# Altium PCB USBtoUARTboard.PcbDoc
Units mil, origin at the board's own origin, x right, y up, seen from the top; angles counter-clockwise.
Board outline 1035 x 1010 mil, 2 copper layers (Top Layer, Bottom Layer); 23 components, 21 nets, 82 pads, 83 vias.
Unrouted connection lines stored in the file: 1.
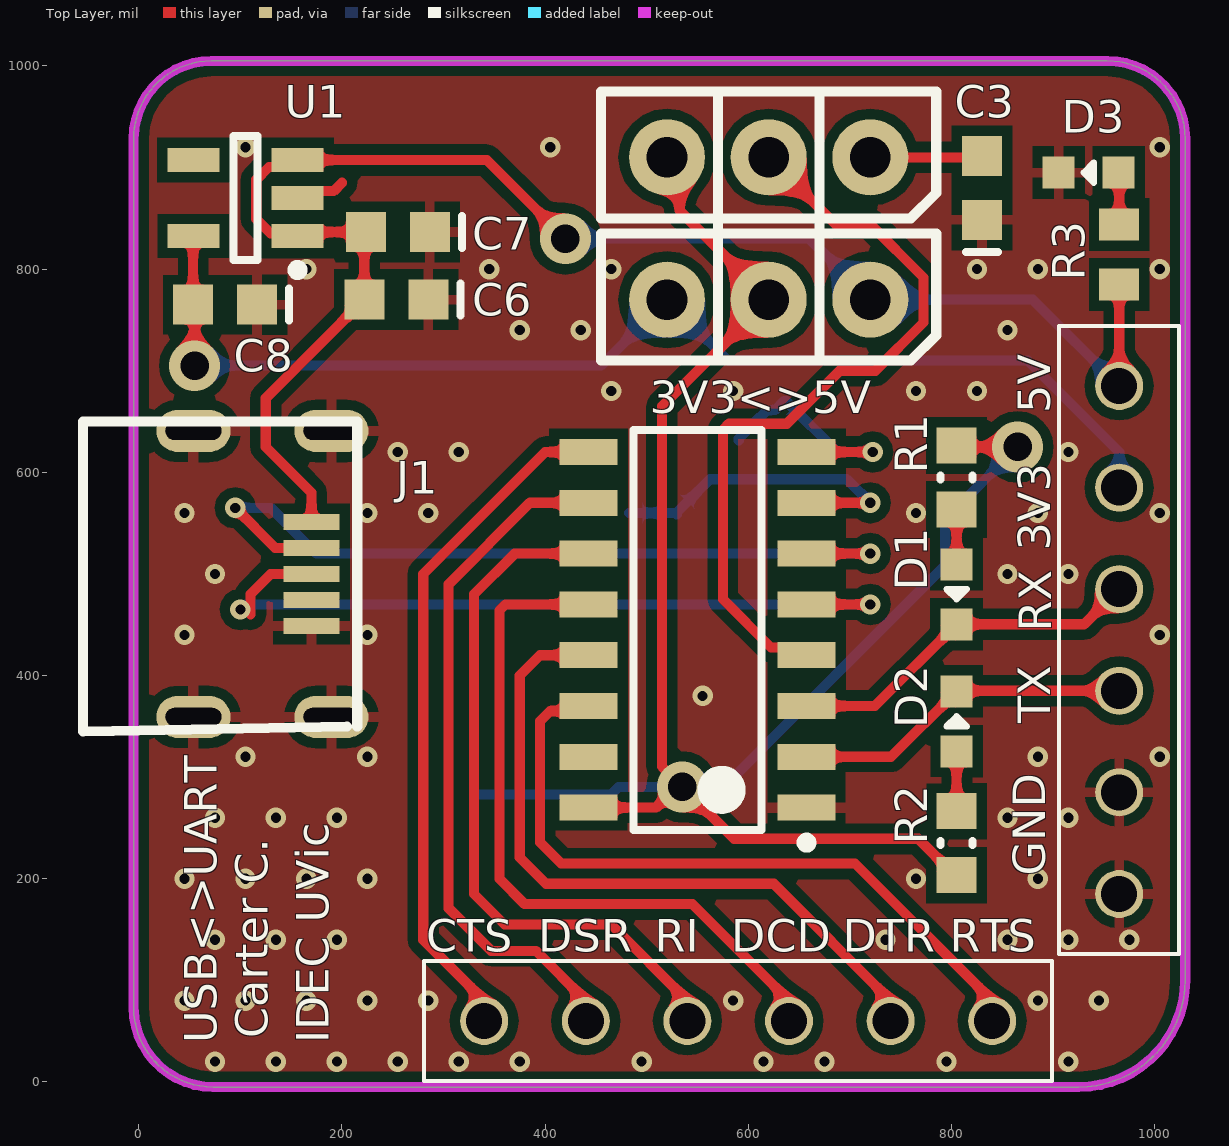
[diagram p0: Top Layer view]
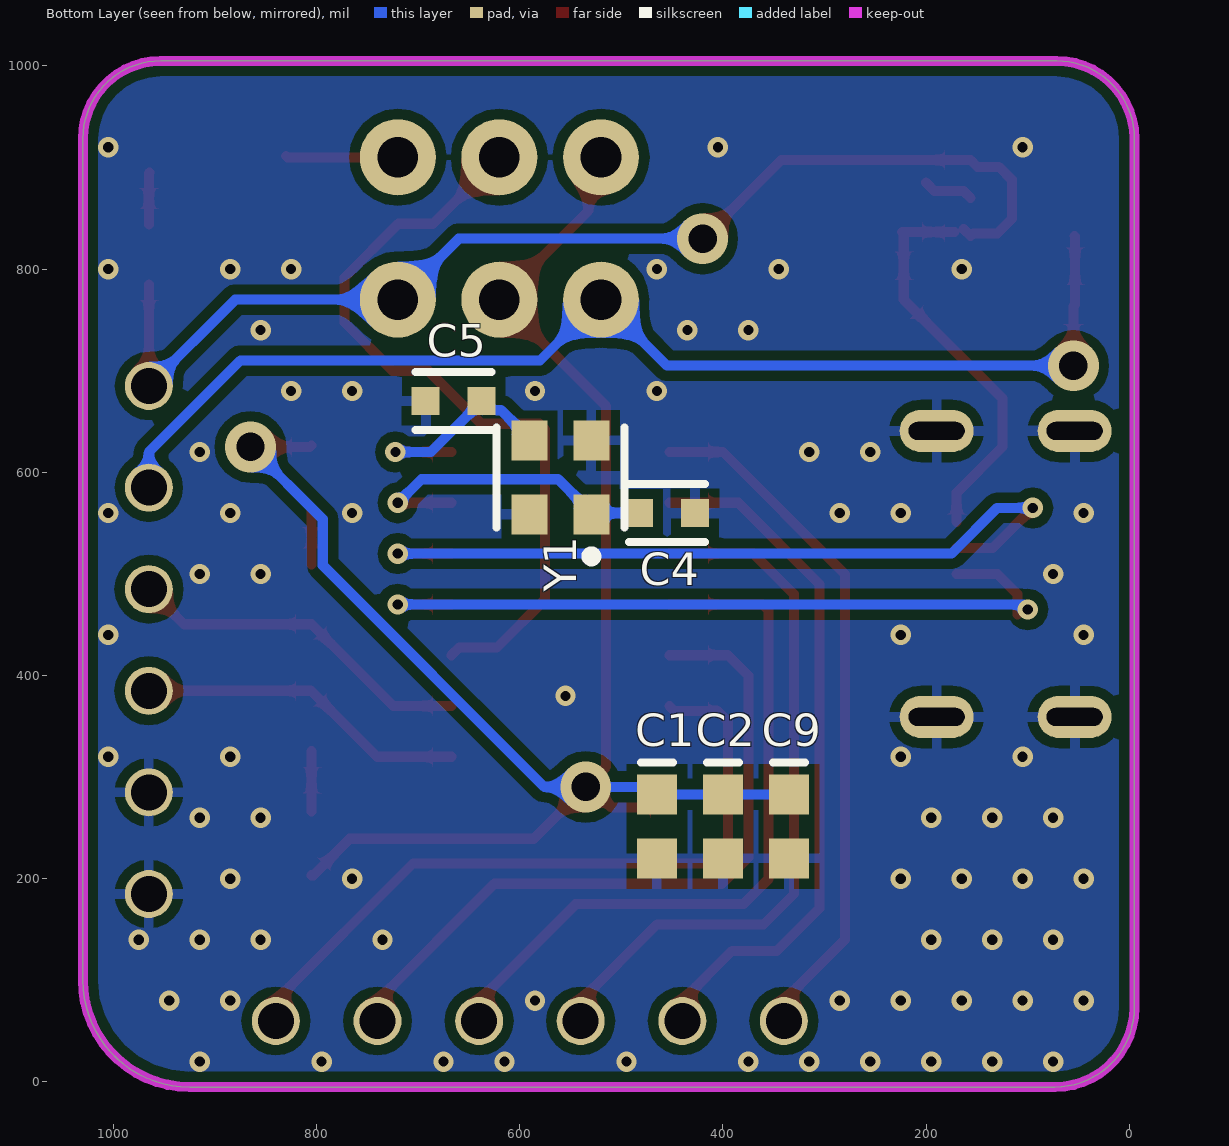
[diagram p1: Bottom Layer view, seen from below]
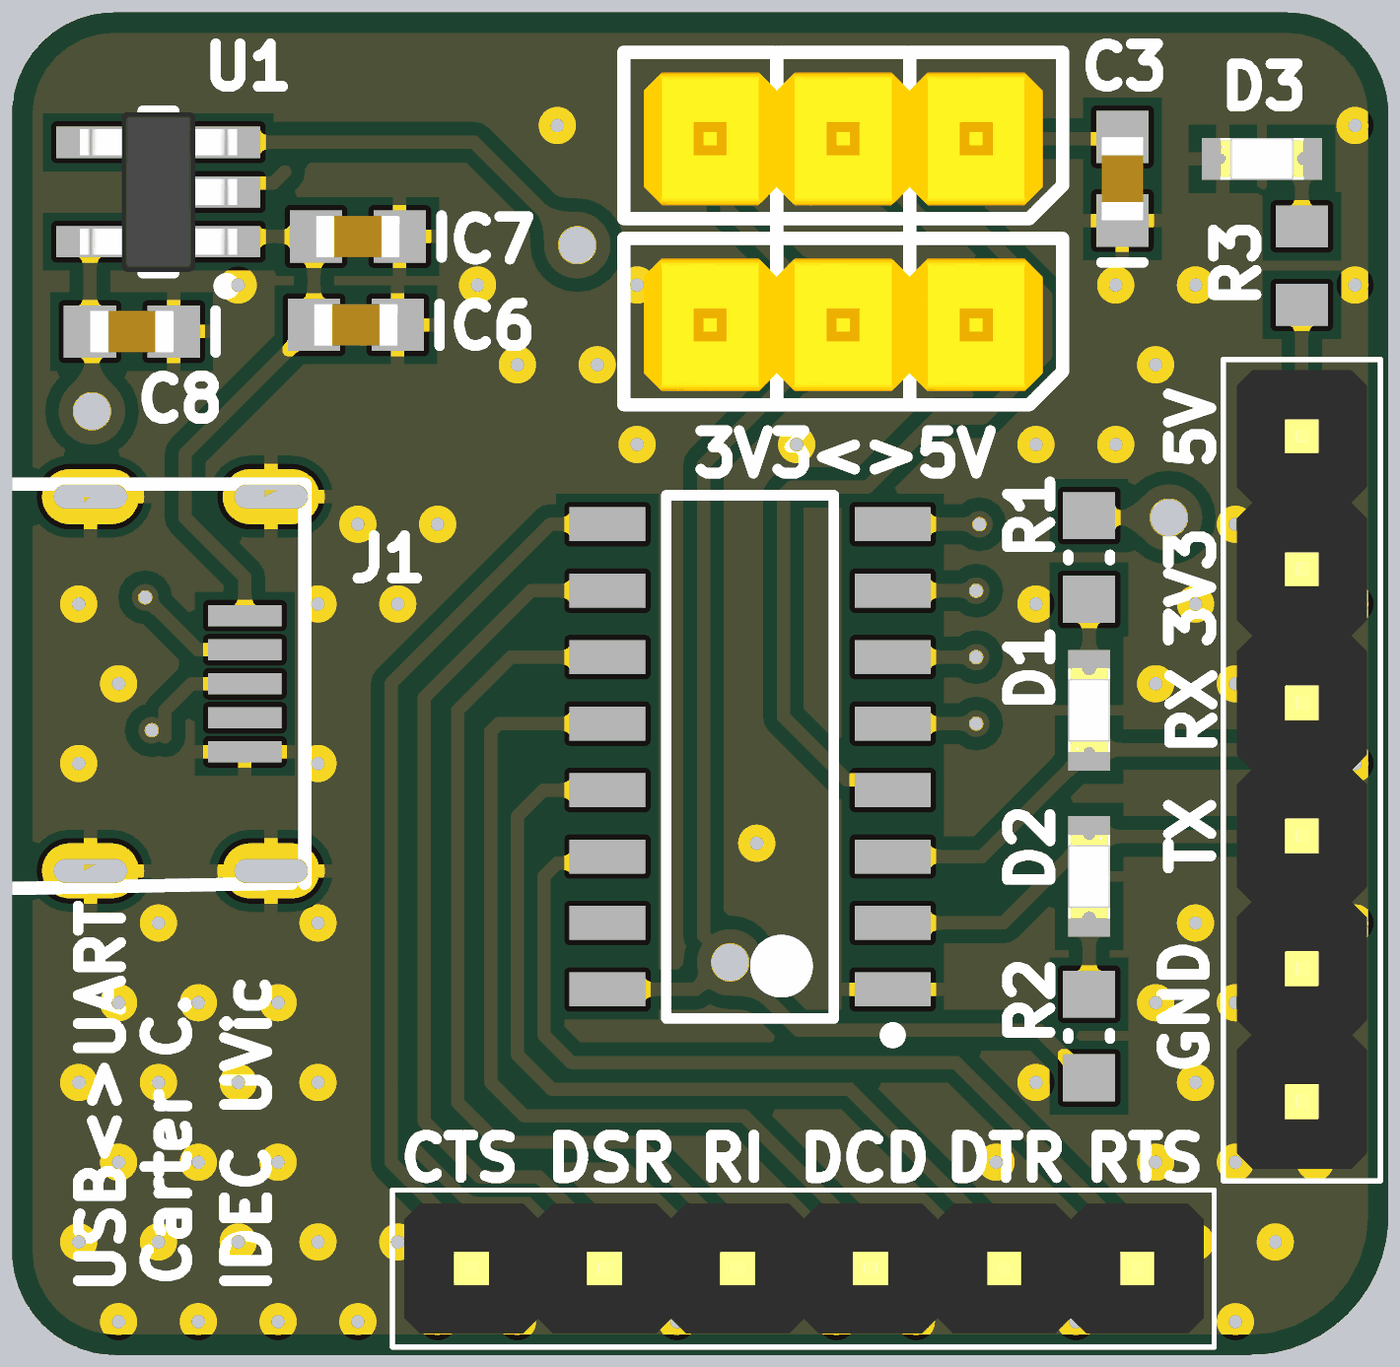
[diagram p2: 3D render of the assembled board from above, using the file's embedded part models]
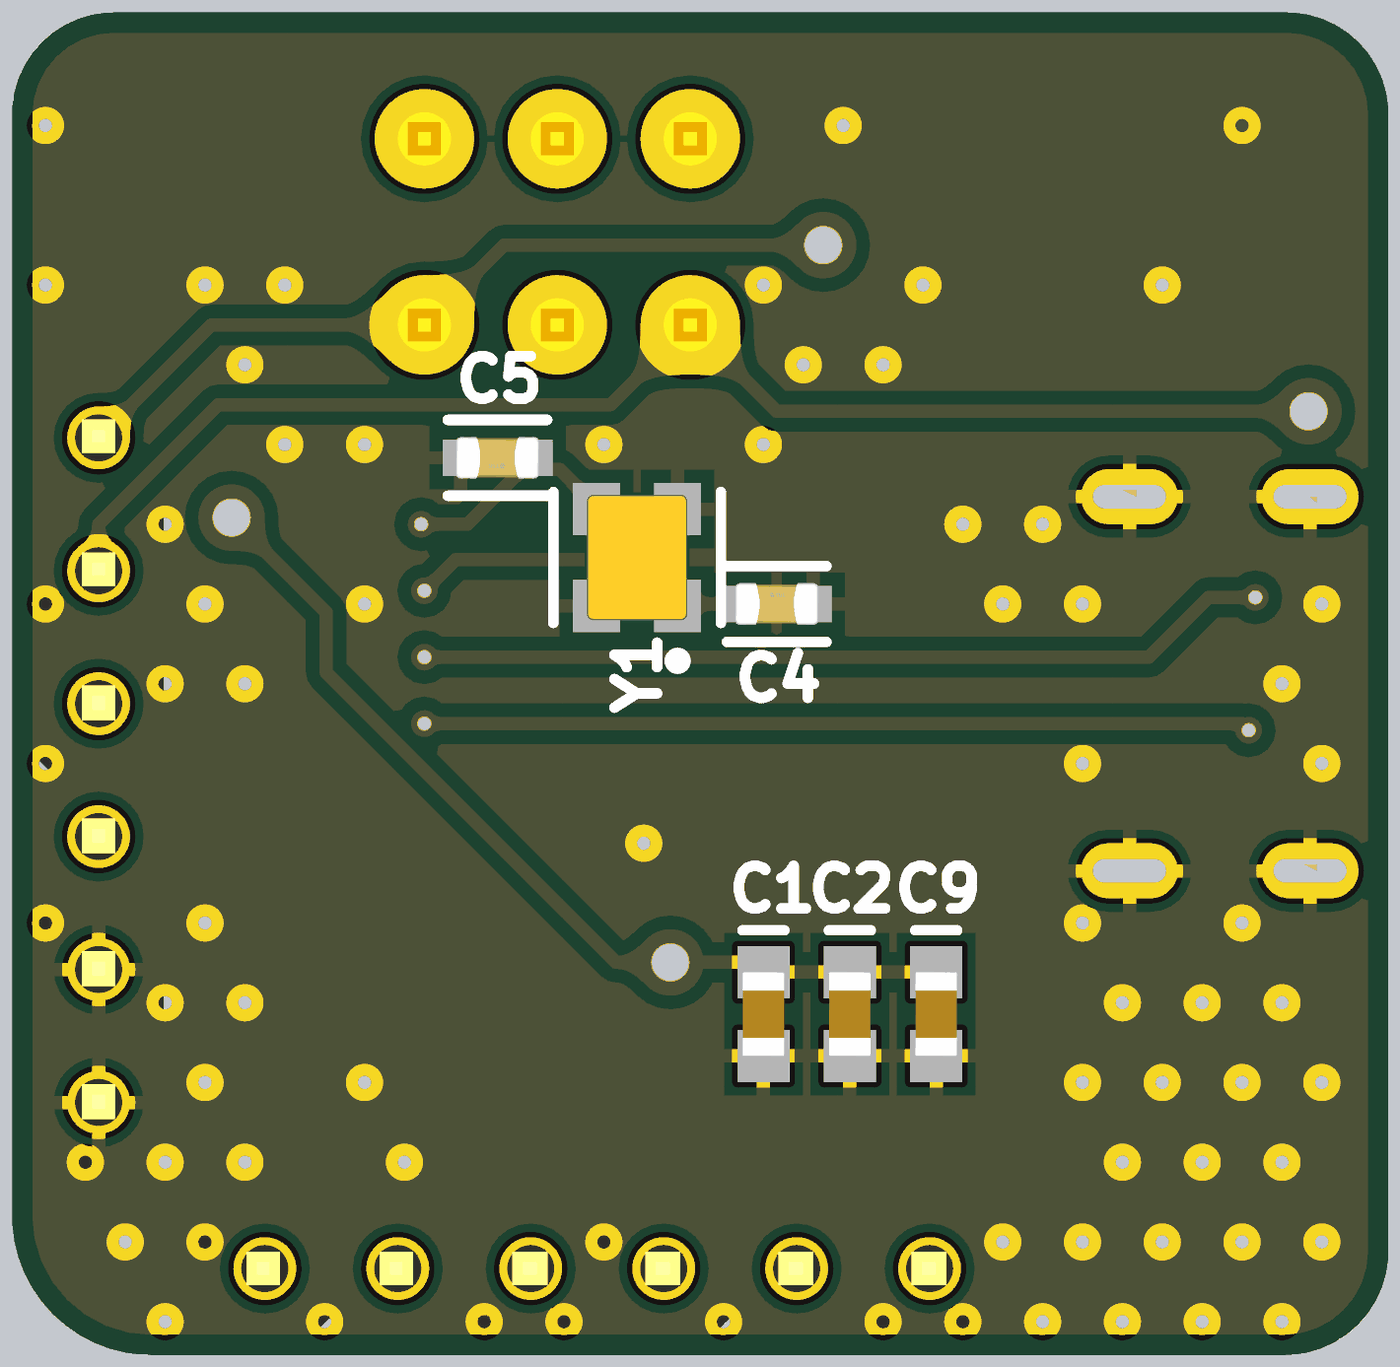
[diagram p3: 3D render of the assembled board from below, using the file's embedded part models]

## Layer stack, top to bottom
Top Solder: solder mask 0.4, Solder Resist, Dk 3.5
Top Layer: signal copper 1.4
Dielectric 1: dielectric 12.6, FR-4, Dk 4.8
Bottom Layer: signal copper 1.4
Bottom Solder: solder mask 0.4, Solder Resist, Dk 3.5

## Board outline
-5,73.28 -5,928.38 cw(c71.62,928.38) 71.62,1005 953.38,1005 cw(c953.38,928.38) 1030,928.38 1030,100 cw(c925,100) 925,-5 73.28,-5 cw(c73.28,73.28)

## Design rules (kind name [scope] priority, off if disabled: settings)
Clearance [All] p1: gap=10 ignorepadtopadclearanceinfootprint=TRUE except(0: Arc-Hole Track-Hole SMDPad-Hole THPad-Hole Via-Hole Fill-Hole Poly-Hole Region-Hole Text-Hole)
PolygonConnect [All] p1: connectstyle=Relief reliefconductorwidth=10 reliefentries=4 polygonreliefangle="90 Angle" airgapwidth=10
RoutingVias [All] p1: holewidth=28 width=50 viastyle="Through Hole" minholewidth=8 minwidth=18 maxholewidth=28 maxwidth=50
SolderMaskExpansion [All] p1: expansion=4 istentingtop=FALSE
Width [All] p1: maxlimit=10 minlimit=10 preferedwidth=10
30 further rules are at their usual default settings.

## Classes and differential pairs
component class main: C1 C2 C3 C4 C5 C6 C7 C8 C9 D1 D2 D3 J1 R1 R2 R3 U1 Y1

## Components (designator, comment, footprint, x,y, rotation, side; value= is the part's Value field where it differs from the comment)
* "WCH-CH340G" SOP127P600X175-16N 550,445 r180 top
C1 "0.1uF 16V 0603 SMD, Ceramic" "CAPC1608N(0603\")" 465,251.5 r270 bottom value=0.1µF
C2 "0.1uF 16V 0603 SMD, Ceramic" "CAPC1608N(0603\")" 400,251.5 r270 bottom value=10µF
C3 "0.1uF 16V 0603 SMD, Ceramic" "CAPC1608N(0603\")" 830,880 r90 top value=0.1µF
C4 "CGA3E2C0G1H180J080AA" FP-CGA3E-0_3-0_1-MFG 455,560 r180 bottom
C5 "CGA3E2C0G1H180J080AA" FP-CGA3E-0_3-0_1-MFG 665,670 r0 bottom
C6 "1uF 50V 0603 SMD, Ceramic" "CAPC1608N(0603\")" 253.5,770 r180 top value=1µF
C7 "0.1uF 16V 0603 SMD, Ceramic" "CAPC1608N(0603\")" 255,836.5 r180 top value=0.1µF
C8 "4.7uF 10V 0603 SMD, Ceramic" "CAPC1608N(0603\")" 85,765 r180 top value=4.7µF
C9 "1uF 50V 0603 SMD, Ceramic" "CAPC1608N(0603\")" 335,251.5 r270 bottom value=1µF
CN1 "Header, Male, 1x6" "Header, Male, 1X6" 965,185 r90 top
CN2 "Header, Male, 1x6" "Header, Male, 1X6" 340,60 r0 top
CN3 "Header, Male, 1x3, Pitch: 0.1\" (2.54mm), THT" "Header, Male, 1x3, Pitch: 0.1\" (2.54mm),THT" 620,770 r180 top
CN4 "Header, Male, 1x3, Pitch: 0.1\" (2.54mm), THT" "Header, Male, 1x3, Pitch: 0.1\" (2.54mm),THT" 620,910 r180 top
D1 "LT Q39G-Q1OO-25-1" FP-LB_Q39E-MFG 805,480 r90 top
D2 "LSQ976-NR-1" FP-LB_Q39E-MFG 805,355 r270 top
D3 "LBQ39E-N1OO-35-1" FP-LB_Q39E-MFG 935,895 r0 top
J1 "USB - Micro B Female SMD" "Edge Connector" 170,500 r270 top
R1 "RC0603FR-07750RL" RESC0603(1608)_N 805,595 r270 top
R2 "RC0603FR-07750RL" RESC0603(1608)_N 805,235 r270 top
R3 "RC0603FR-07110RL" RESC1608X55X25ML10T15 965,814.53 r270 top
U1 "LP2981-33DBVR" SOT95P280X145-5N 105,870 r180 top
Y1 "8Z-12.000MAAJ-T" FP-8Z-MFG 560,595 r90 bottom

## Footprints (in the part's own frame and the unit in brackets; to place one, negate y for a bottom-side part, rotate by r counter-clockwise, add the part's x,y. Pads: shape width x height; smd on the part's side, far side on the other; paste and mask are expansions set on the pad)
"CAPC1608N(0603\")" [mm] "Chip Capacitor, Body 1.6x0.8mm (0603\"), IPC Medium Density"
  rect 1x1 smd: 1(-0.8,0) 2(0.8,0)
  silkscreen extent -1.6,-0.4 -1.6,0.4, body extent -0.8,-0.4 0.8,0.4, height 0.9
"Edge Connector" [mm]
  rect 0.4x1.4 smd: 1(-1.3,0) 2(-0.65,0) 3(0,0) 4(0.65,0) 5(1.3,0)
  oval 1.05x1.85 hole 1.4 slot 0.45 at 0 deg: 6(-3.575,0.5) 7(-3.575,-2.95) 8(3.575,0.5) 9(3.575,-2.95)
  silkscreen extent -3.81,-5.72 3.94,1.14, body extent -4,-5.71 4,0.89, height 3.02
FP-8Z-MFG [mm]
  rect 1x0.9 smd paste+0 mask+0: 1(-0.925,-0.775) 2(0.925,-0.775) 3(0.925,0.775) 4(-0.925,0.775)
  silkscreen extent -2.1,-1.6 1.25,1.6, body extent -1.25,-1 1.25,1, height 0.55
FP-CGA3E-0_3-0_1-MFG [mm]
  rect 0.7x0.7 smd paste+0 mask+0: 1(-0.7,0) 2(0.7,0)
  silkscreen extent -0.95,-0.72 0.95,0.72, body extent -0.8,-0.4 0.8,0.4, height 1.1
FP-LB_Q39E-MFG [mm]
  rect 0.8x0.8 smd paste+0 mask+0: 1(-0.75,0) 2(0.75,0)
  silkscreen extent -0.13,-0.25 0.13,0.25, body extent -1.25,-0.55 1.25,0.55, height 0.25
"Header, Male, 1x3, Pitch: 0.1\" (2.54mm),THT" [mm]
  round 1.9 hole 1.016: 1(-2.54,0) 2(0,0) 3(2.54,0)
  silkscreen extent -4.19,-1.65 4.19,1.52, body extent -3.81,-1.27 3.81,1.27, height 9.5
"Header, Male, 1X6" [mm]
  round 1.2 hole 0.9: 1(0,0) 2(2.54,0) 3(5.08,0) 4(7.62,0) 5(10.16,0) 6(12.7,0)
  silkscreen extent -1.5,-1.5 14.2,1.5, body extent -1.27,-1.24 14,1.25, height 8.54
RESC0603(1608)_N [mm] "Chip Resistor, Body 1.6x0.8mm, IPC Medium Density"
  rect 0.9x1 smd: 1(-0.8,0) 2(0.8,0)
  silkscreen extent -0.05,-0.4 0.05,0.4, body extent -0.85,-0.47 0.85,0.47, height 0.6
RESC1608X55X25ML10T15 [mm] "Chip Resistor, 2-Leads, Body 1.60x0.80mm, IPC Low Density"
  rect 0.8x1 smd: 1(-0.75,0) 2(0.75,0)
  body extent -0.85,-0.45 0.85,0.45, height 0.55
SOP127P600X175-16N [mm] "SOP, 16-Leads, Body 9.90x3.90mm, Pitch 1.27mm, IPC Medium Density"
  rect 1.45x0.65 smd: 1(-2.725,4.445) 2(-2.725,3.175) 3(-2.725,1.905) 4(-2.725,0.635) 5(-2.725,-0.635) 6(-2.725,-1.905) 7(-2.725,-3.175) 8(-2.725,-4.445) 9(2.725,-4.445) 10(2.725,-3.175) 11(2.725,-1.905) 12(2.725,-0.635) 13(2.725,0.635) 14(2.725,1.905) 15(2.725,3.175) 16(2.725,4.445)
  silkscreen extent -2.85,-5 1.6,5.44, body extent -2,-5 2,5, height 1.75
SOT95P280X145-5N [mm] "SOT23, 5-Leads, Body 2.90x2.80mm, Pitch 0.95mm, IPC Medium Density"
  rect 1.3x0.6 smd: 1(-1.3,0.95) 2(-1.3,0) 3(-1.3,-0.95) 4(1.3,-0.95) 5(1.3,0.95)
  silkscreen extent -1.43,-1.55 0.3,1.92, body extent -1.5,-1.53 1.5,1.53, height 1.45

## Part data
*: library part CMP-031-0001-1, "USB to UART Transceiver. USB 2.0 2Mbps. LCSC #C14267", LCSC Part Number=C14267
C1 C2 C3 C7: library part CMP-006-0005-1, "Capacitor, Ceramic, 16V, +/- 10%, 0603 SMD, X7R", Component Type=Standard, Created By="Andy Bates", Design Item ID="0.1uF 16V 0603 SMD, Ceramic", PackageDescription="Chip Capacitor", Pin Count=2, Published=16-04-26, Publisher=AUVic, Source=AUVic_Schematic_Library_Capacitors.SchLib
C4 C5: library part CMP-00115-1, "CAP CER 18PF 50V C0G 0603", Capacitance=18pF, Case Code (Imperial)=0603, Case Code (Metric)=1608, Dielectric=C0G, Max Operating Temperature=125°C, Min Operating Temperature=-55°C, Package Quantity=1, Ratings=AEC-Q200, Resistor Type=Ceramic, Tolerance=5%, Voltage Rating=50V, Case/Package=0603, Depth=0.8mm, DK #=445-5631-1-ND, Height=0.8mm, Lead Free="Lead Free", Length=1.6mm, Mount="Surface Mount", Packaging="Tape and Reel", Radiation Hardening=No, REACH SVHC="No SVHC", Termination=SMD/SMT, Thickness=0.035inch, Voltage Rating (DC)=50V, Weight=7.1E-05oz, Width=0.031inch
C6 C9: library part CMP-006-0028-1, "Capacitor, Ceramic, 50V, +/- 10%, 0603 SMD, X5R", Component Type=Standard, Created By="Lyden Smith", Date Created=2017-10-26, Design Item ID="1uF 50V 0603 SMD, Ceramic", PackageDescription="Chip Capacitor", Pin Count=2, Source=AUVic_Schematic_Library_Capacitors.SchLib
C8: library part CMP-006-0043-1, "Capacitor, Ceramic, 10V, +/- 10%, 0603 SMD, X5R", Component Type=Standard, Created By="Ashwin Sira", Design Item ID="4.7uF 10V 0603 SMD, Ceramic", MFG=Samsung, MFG#=GRM188R61A475KE15D, PackageDescription="Chip Capacitor", Pin Count=2, Published=16-06-23, Publisher=AUVic, Source=AUVic_Schematic_Library_Capacitors.SchLib
CN1 CN2: library part CMP-005-0031-1, "1x6, Pads Pitch: 0.1\" (2.54mm), Through hole", Supplier 1 Part Number=952-2270-ND, Component Type=Standard, Design Item ID="Header, Male, 1x6", Made Bates="Andy Bates", Pin Count=6, Source=AUVic_Schematic_Library_Connectors.SchLib
CN3 CN4: library part CMP-005-0025-1, Component Type=Standard, Created By="Ashwin Sira", Date Published=2016-03-03, Design Item ID="Header, Male, 1x3, Pitch: 0.1\" (2.54mm), THT", Pin Count=3, Publisher=AUVic, Source=AUVic_Schematic_Library_Connectors.SchLib
D1: library part CMP-00064-3, "LED GREEN DIFFUSED 0603 SMD", Case/Package=SMD/SMT, Color=Green, Forward Current=15mA, Forward Voltage=2.85V, Max Operating Temperature=85°C, Min Operating Temperature=-40°C, Reverse Voltage=5V, Test Current=5mA, Depth=0.9mm, Dominant Wavelength=530nm, Length=1.7mm, Lens Style=Diffused,Colorless,Rectangular, Luminous Flux=0.55lm, Luminous Intensity=280mcd, Mount="Surface Mount", Number of Elements=1, Number of LEDs=1, Number of Pins=2, Packaging="Tape and Reel", Radiation Hardening=No
D2: library part CMP-00066-2, "LED Red 645nm 2-Pin Chip 0603(1608Metric) T/R", Case Code (Imperial)=0603, Case Code (Metric)=1608, Color=Red, Forward Current=25mA, Forward Voltage=2.5V, Lens Color=White, Max Operating Temperature=85°C, Min Operating Temperature=-30°C, Package Quantity=1, Power Dissipation=65mW, Reverse Voltage=12V, Test Current=20mA, Case/Package=0603, Depth=0.9mm, Dominant Wavelength=633nm, Height=0.8mm, Illumination Color=Red, Length=1.7mm, Lens Size=0.8mm, Lens Style=Diffused,Flat,Colorless,Rectangular, Lens Transparency=Diffused, Luminous Flux=0.33lm, Luminous Intensity=180mcd, Mount="Surface Mount", Number of Elements=1, Number of LEDs=1, Number of Pins=2, Packaging="Tape and Reel", Radiation Hardening=No, Viewing Angle=160°, Width=0.8mm
D3: library part CMP-00063-3, "LED BLUE DIFFUSED 0603 SMD", Case Code (Imperial)=0603, Case Code (Metric)=1608, Color=Blue, Forward Voltage=2.85V, Lens Color=White, Test Current=5mA, Case/Package=0603, Dominant Wavelength=470nm, Height=0.4mm, Length=1.6mm, Lens Size=0.8mm, Lens Style=Flat,Diffused,Colorless,Rectangular, Lens Transparency=Diffused, Luminous Flux=0.13lm, Luminous Intensity=42mcd, Mount="Surface Mount", Number of LEDs=1, Number of Pins=2, Packaging="Tape and Reel", Radiation Hardening=No, Viewing Angle=130°, Width=0.8mm
J1: library part CMP-00108-2, "USB - Micro B Female USB 2 5 SMD USB Connectors", LCSC Part Number=C319170, Created By="Miguel Manguerra"
R1: library part CMP-00070-1, "Res Thick Film 0603 750 Ohm 1% 0.1W(1/10W) ±100ppm/C Epoxy SMD T/R", Case Code (Imperial)=0603, Case Code (Metric)=1608, Max Operating Temperature=155°C, Max Power Dissipation=100mW, Min Operating Temperature=-55°C, Package Quantity=1, Resistance=500R, Temperature Coefficient=100ppm/°C, Tolerance=1%, Voltage Rating=50V, Case/Package=0603, Composition="Thick Film", Depth=0.8mm, Features="Moisture Resistant", Height=0.022inch, Lead Free="Lead Free", Length=1.6mm, Military Standard=Not, Number of Terminations=2, Packaging="Tape and Reel", Power Rating=100mW, Termination=SMD/SMT, Voltage Rating (DC)=50V, Width=0.031inch
R2: library part CMP-00070-1, "Res Thick Film 0603 750 Ohm 1% 0.1W(1/10W) ±100ppm/C Epoxy SMD T/R", Case Code (Imperial)=0603, Case Code (Metric)=1608, Max Operating Temperature=155°C, Max Power Dissipation=100mW, Min Operating Temperature=-55°C, Package Quantity=1, Resistance=750R, Temperature Coefficient=100ppm/°C, Tolerance=1%, Voltage Rating=50V, Case/Package=0603, Composition="Thick Film", Depth=0.8mm, Features="Moisture Resistant", Height=0.022inch, Lead Free="Lead Free", Length=1.6mm, Military Standard=Not, Number of Terminations=2, Packaging="Tape and Reel", Power Rating=100mW, Termination=SMD/SMT, Voltage Rating (DC)=50V, Width=0.031inch
R3: library part CMP-00069-1, "RES SMD 110 OHM 1% 1/10W 0603", Case Code (Imperial)=0603, Case Code (Metric)=1608, Max Operating Temperature=155°C, Max Power Dissipation=100mW, Min Operating Temperature=-55°C, Package Quantity=1, Resistance=110R, Temperature Coefficient=100ppm/°C, Tolerance=1%, Voltage Rating=50V, Working Voltage=75V, Case/Package=0603, Composition="Thick Film", Depth=0.8mm, Features="Moisture Resistant", Height=0.022inch, Lead Free="Lead Free", Length=1.6mm, Military Standard=Not, Number of Terminations=2, Packaging="Tape and Reel", Power Rating=100mW, Termination=SMD/SMT, Voltage Rating (DC)=50V, Width=0.031inch
U1: library part CMP-044-0003-2, "IC REG LINEAR 3.3V 100MA SOT23-5", Case/Package=SOT-23, Dropout Voltage=200mV, Input Bias Current=600uA, Max Input Voltage=16V, Max Operating Temperature=125°C, Max Output Current=100mA, Min Input Voltage=2.2V, Min Operating Temperature=-40°C, Nominal Output Voltage=3.3V, Output Voltage Accuracy=2%, Package Quantity=1, Accuracy=2%, Contact Plating=Tin,Matte, Lead Free="Lead Free", Mount="Surface Mount", Number of Outputs=1, Number of Pins=5, Number of Regulators=1, Output Current=100mA, Output Type=Fixed, Output Voltage=3.3V, Packaging="Tape and Reel", Polarity=Positive, Quiescent Current=600uA, Radiation Hardening=No, REACH SVHC="No SVHC"
Y1: library part CMP-18717-000009-1, "CRYSTAL 12.0000MHZ 18PF SMD", Case/Package=SMD/SMT, ESR (Equivalent Series Resistance)=150R, Frequency=12MHz, Frequency Stability=30ppm, Load Capacitance=18pF, Max Operating Temperature=70°C, Min Operating Temperature=-20°C, Package Quantity=1, Depth=2mm, Frequency Tolerance=30ppm, Height=0.022inch, Length=2.5mm, Mount="Surface Mount", Number of Pins=4, Packaging="Tape and Reel", REACH SVHC="No SVHC", Termination=SMD/SMT, Tolerance=30ppm, Width=0.079inch

## Via types
v1: diameter 20, hole 10, Top Layer to Bottom Layer, 73 vias
v2: diameter 20, hole 10, Top Layer to Bottom Layer, tented both sides, 6 vias
v3: diameter 50, hole 28, Top Layer to Bottom Layer, tented both sides, 4 vias

## Nets (pads, with @x,y where several pads share a name; then routed paths per layer and width w, separated by ;. In a path a pad name is that pad's centre, name@x,y a point inside that pad or via, vN(x,y) a via of type N, cw(c..) or ccw(c..) an arc to the next point about the centre after c; other vN are vias at no path point)
3V3: C8.2 CN1.5 CN3.3 U1.5 | length 1162.4
  Top Layer w10: U1.5 53.5,832.28 C8.2 55,763.5 v3(55,705)
  Bottom Layer w10: v3(55,705) 455,705 CN3.3 580,710 875,710 965,620 CN1.5
5V: C6.2 C7.2 CN1.6 CN3.1 J1.1 R3.2 U1.1 U1.3 | length 1540.8
  Top Layer w10: U1.1@162.99,839.41 U1.1 153.78,835 130,835 115.59,849.41 115.59,888.02 128.16,900.59 149.37,900.59 U1.3 342.6,907.4 v3(420,830) ; J1.1 170,580 125,625 125,672.99 C6.2 C7.2@222.01,836.5 ; U1.1@172.24,836.5 C7.2@222.01,836.5 ; C7.2 C7.2@222.01,836.5 ; CN1.6 R3.2
  Bottom Layer w10: v3(420,830) 660,830 CN3.1 880,770 CN1.6
GND: *.1 C1.2 C2.2 C3.1 C4.2 C5.2 C6.1 C7.1 C8.1 C9.2 CN1.1 CN1.2 D3.1 J1.5 J1.6 J1.7 J1.8 J1.9 U1.2 Y1.2 Y1.4 | length 50
  Top Layer w10: U1.2 162.99,876.81 191.81,876.81 200,885
  other v1: 75,20 135,20 195,20 255,20 315,20 375,20 495,20 615,20 675,20 795,20 915,20 45,80 105,80 165,80 225,80 285,80 585,80 885,80 945,80 75,140 135,140 195,140 735,140 855,140 915,140 975,140 45,200 105,200 165,200 225,200 765,200 885,200 75,260 135,260 195,260 855,260 915,260 105,320 225,320 885,320 1005,320 555,380 45,440 225,440 1005,440 75,500 855,500 915,500 45,560 225,560 285,560 765,560 885,560 1005,560 255,620 315,620 915,620 465,680 585,680 765,680 825,680 375,740 435,740 855,740 165,800 345,800 465,800 825,800 885,800 1005,800 105,920 405,920 1005,920
Net*_9: *.9 CN2.1 | length 667.3
  Top Layer w10: CN2.1@340,80 280,140 280,500 400,620 *.9@452.72,620
Net*_10: *.10 CN2.2 | length 672.6
  Top Layer w10: CN2.2@440,80 391.01,128.99 346.87,128.99 305,170.86 305,490 385,570 *.10@452.72,570
Net*_11: *.11 CN2.3 | length 687.8
  Top Layer w10: *.11@452.72,520 370,520 330,480 330,185 360,155 465,155 CN2.3@540,80
Net*_12: *.12 CN2.4 | length 699
  Top Layer w10: *.12@452.72,470 360.86,470 355,464.14 355,200 380,175 545,175 CN2.4@640,80
Net*_13: *.13 CN2.5 | length 688.5
  Top Layer w10: *.13@452.72,420 395,420 375,400 375,220.86 400.86,195 625,195 CN2.5@740,80
Net*_14: *.14 CN2.6 | length 692.6
  Top Layer w10: *.14@452.72,370 447.8,365.08 405.08,365.08 395,355 395,235.86 415.86,215 705,215 CN2.6@840,80
NetC3_2: C3.2 CN4.1 | length 110.6
  Top Layer w10: CN4.1 828.5,910 C3.2
NetD1_2: D1.2 R1.2 | length 54
  Top Layer w10: D1.2 R1.2
NetD2_2: D2.2 R2.1 | length 59
  Top Layer w10: R2.1 D2.2
NetD3_2: D3.2 R3.1 | length 51.1
  Top Layer w10: D3.2 965,894.53 R3.1
RXD: *.3 CN1.4 D1.1 | length 345.4
  Top Layer w10: *.3@667.28,370 724.53,370 D1.1 930.47,450.47 CN1.4
TXD: *.2 CN1.3 D2.1 | length 324.6
  Top Layer w10: *.2@667.28,320 740.47,320 D2.1 805.47,385 CN1.3
UD+: *.5 J1.3 | length 763.1
  Top Layer w10: 110,460 110,480 130,500 J1.3 ; *.5@667.28,470 v2(720,470)
  Bottom Layer w10: v2(100,465) 105,470 v2(720,470)
UD-: *.6 J1.2 | length 787.7
  Top Layer w10: v2(95,565) 134.41,525.59 J1.2 ; *.6@667.28,520 v2(720,520)
  Bottom Layer w10: v2(95,565) 130,565 175,520 v2(720,520)
V3: *.4 CN4.2 | length 768.8
  Top Layer w10: CN4.2 685.35,844.65 719.45,844.65 772.4,791.71 772.4,747.4 725,700 690,700 637.8,647.8 580.86,647.8 575,641.94 575,475 622.37,427.63 659.65,427.63 *.4@667.28,420
VCC: *.16 C1.1 C2.1 C9.1 CN3.2 CN4.3 R1.1 R2.2 | length 1868.4
  Top Layer w10: *.16@452.72,270 509.18,270 529.53,290.36 v3(535,290.36) ; CN4.3 532.4,897.6 532.4,857.6 CN3.2 515,665 515,310.36 v3(535,290.36) ; R2.2 803.03,203.5 767.25,239.28 586.07,239.28 v3(535,290.36) ; R1.1 806.5,625 v3(865,625)
  Bottom Layer w10: C9.1 C2.1 C1.1 472.36,290.36 v3(535,290.36) 575.71,290.36 793.85,508.5 793.85,553.85 v3(865,625)
XI: *.7 C4.1 Y1.1 | length 315.9
  Top Layer w10: *.7@667.28,570 v2(720,570)
  Bottom Layer w10: C4.1 528.07,560 Y1.1 529.49,560.55 562.2,593.27 696.73,593.27 v2(720,570)
XO: *.8 C5.1 Y1.3 | length 222.5
  Top Layer w10: *.8@667.28,620 v2(722.44,620)
  Bottom Layer w10: Y1.3 590.51,633.39 618.35,661.22 626.22,661.22 C5.1@635,670 ; C5.1 687.44,620 v2(722.44,620)
pads on no net: *.15 J1.4 U1.4

## Polygon pours and split planes (outlines as drawn)
GND on Bottom Layer "GND_L02_P001" (solid, pour order 1): 0,925 cw(c75,925) 75,1000 950,1000 cw(c950,925) 1025,925 1025,100 cw(c925,100) 925,0 75,0 cw(c75,75) 0,75
GND on Top Layer "GND_L01_P000" (solid, pour order 0): 0,925 cw(c75,925) 75,1000 950,1000 cw(c950,925) 1025,925 1025,100 cw(c925,100) 925,0 75,0 cw(c75,75) 0,75

## Keep-outs
Keep-Out Layer:
  the board outline again, w10

## Silkscreen, mask and mechanical layers (free items; w line width, h text height)
Top Overlay:
  lines w10: 570,715 570,975 ; 670,715 670,975
  text "3V3<>5V" at 503,658 h32
  text "5V" at 897,658 h32 r90
  text "3V3" at 897,523 h32 r90
  text "RX" at 897.94,443 h32 r90
  text "TX" at 897,353 h32 r90
  text "GND" at 892,203 h32 r90
  text "CTS" at 283,128 h32
  text "DSR" at 393,128 h32
  text "RI" at 508,128 h32
  text "DCD" at 583,128 h32
  text "DTR" at 693,128 h32
  text "RTS" at 798,128 h32
  text "Carter C." at 127,43 h32 r90
  text "USB<>UART" at 77,38 h32 r90
  text "IDEC UVic" at 187,38 h32 r90